# EAGLE board mother (EAGLE 9.3.0)
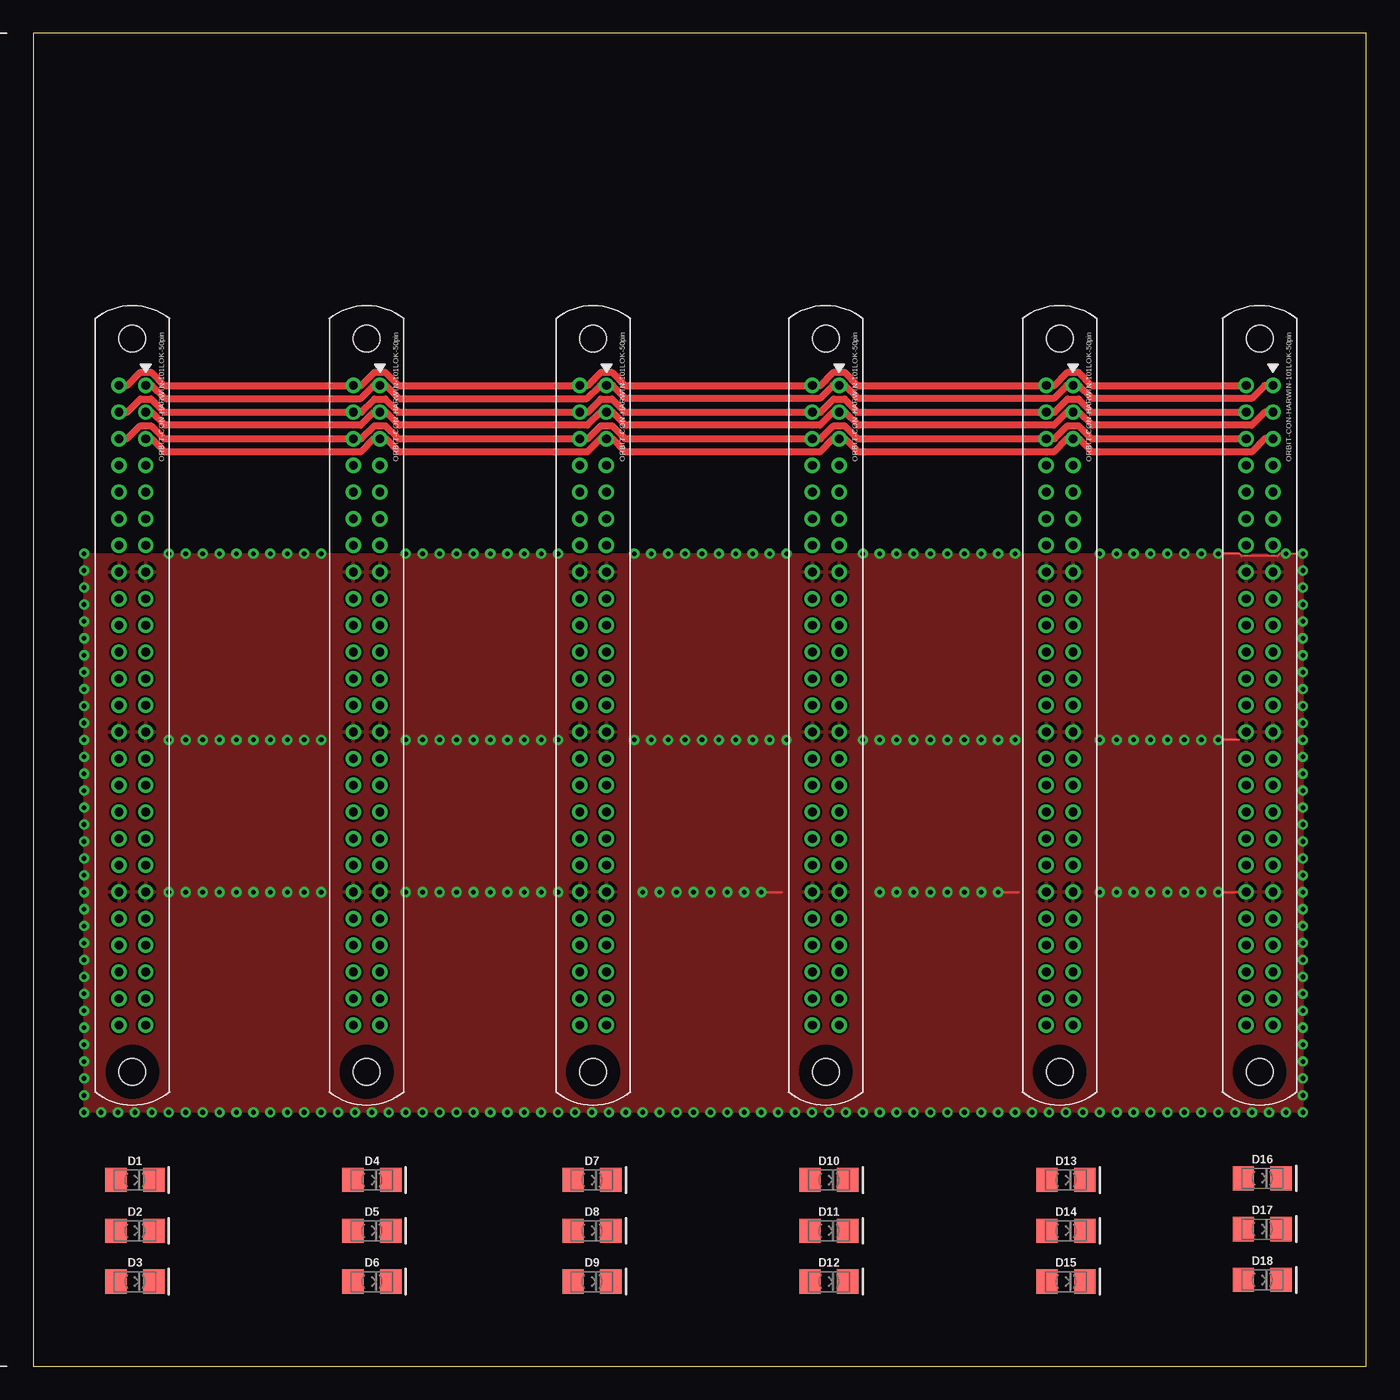
[diagram p0: board, top side]
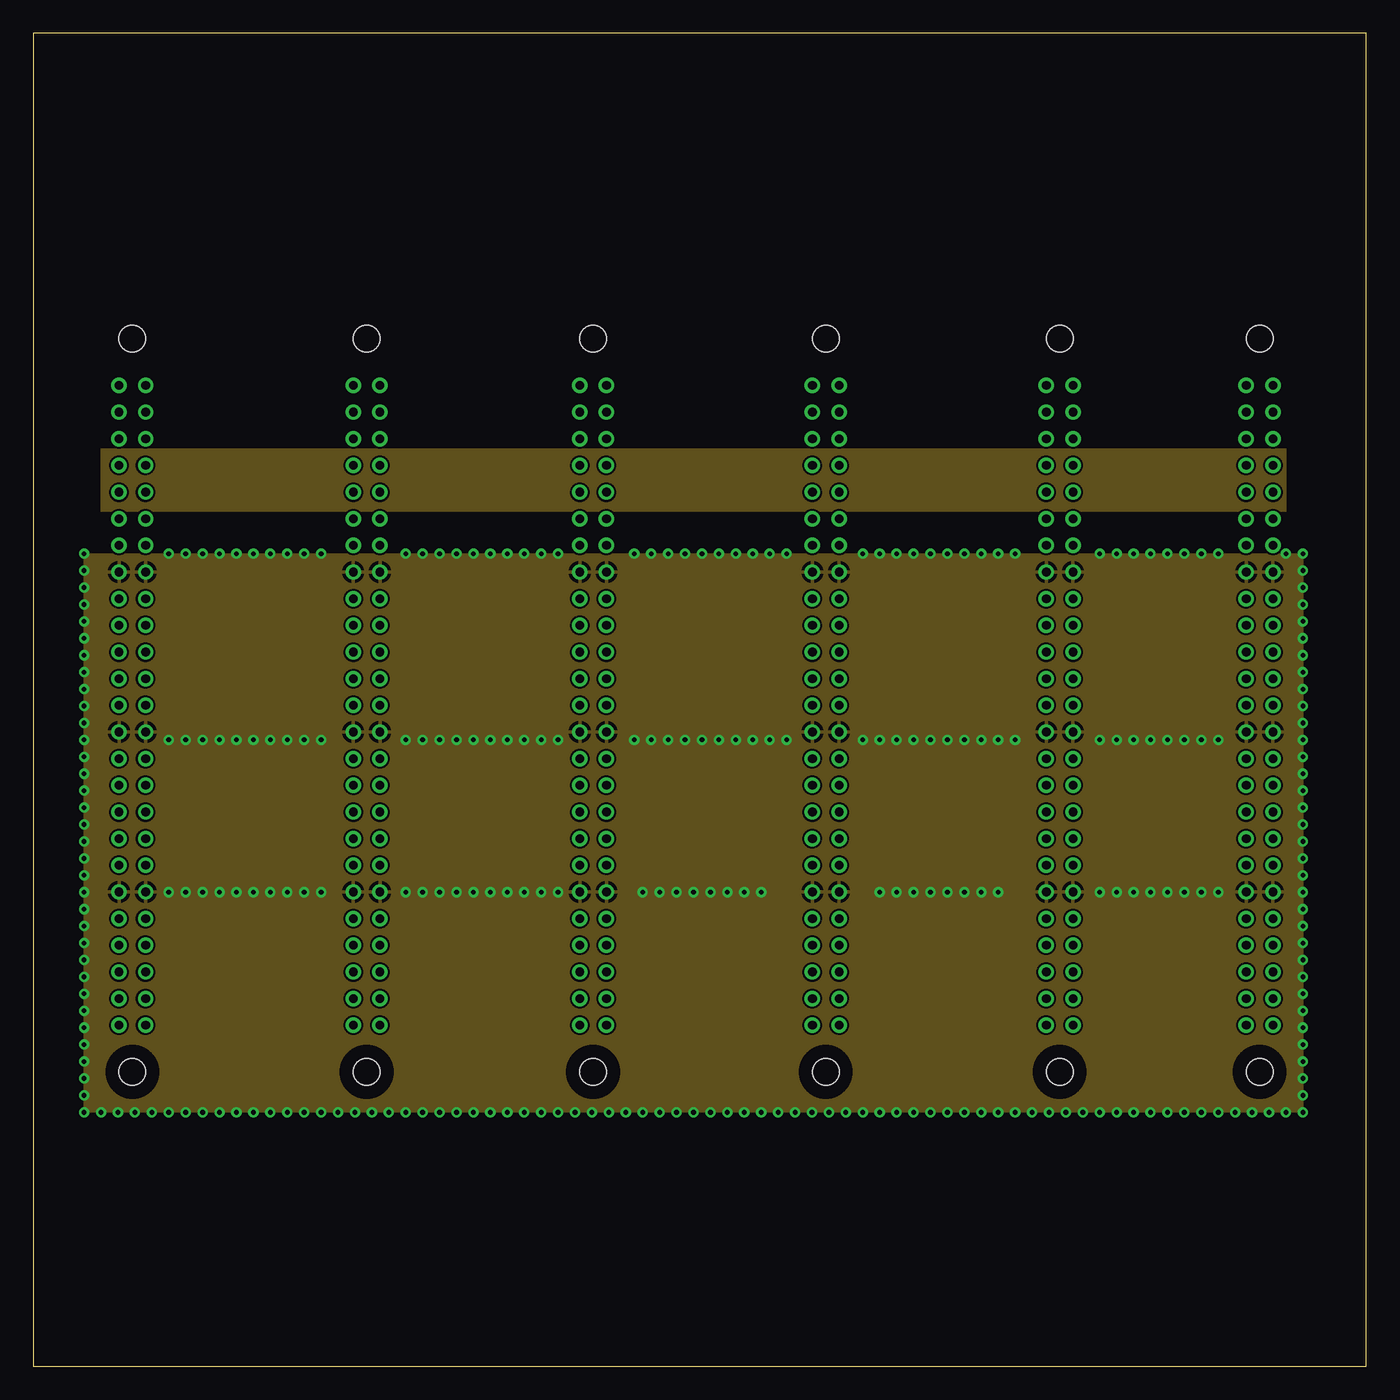
[diagram p1: board, inner layer Route2]
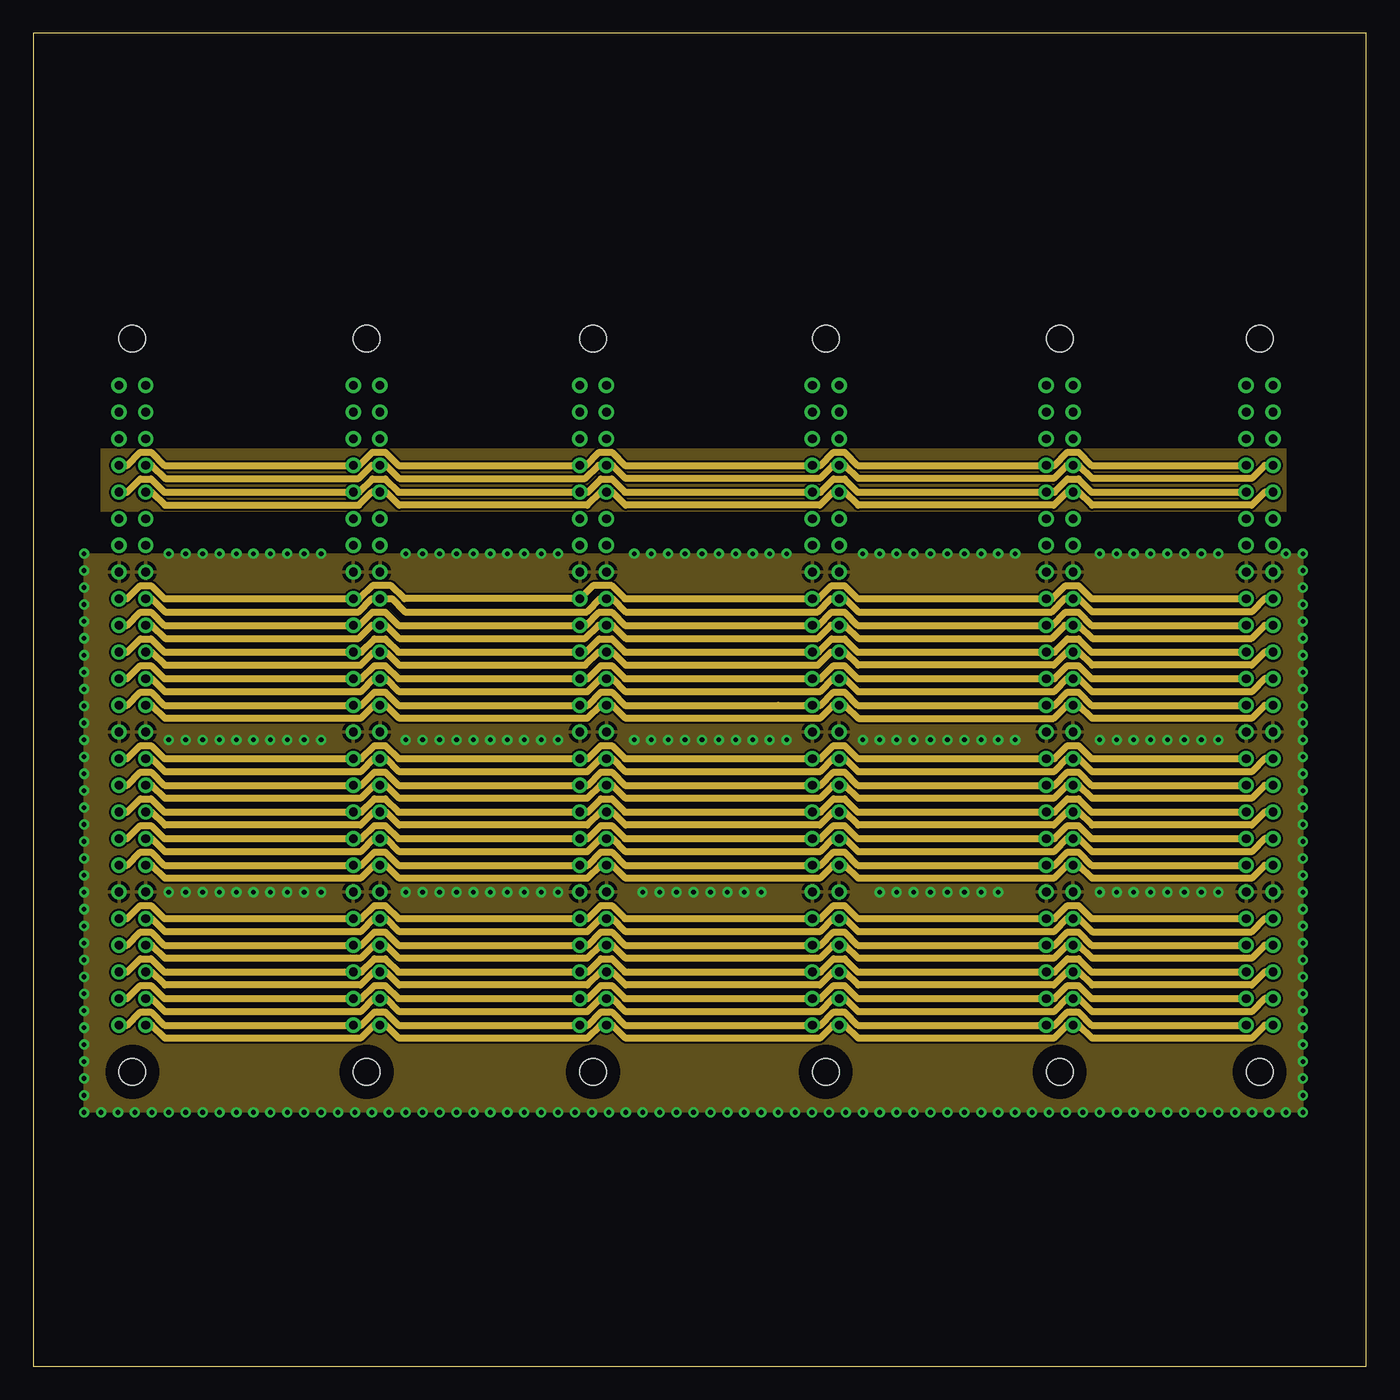
[diagram p2: board, inner layer Route15]
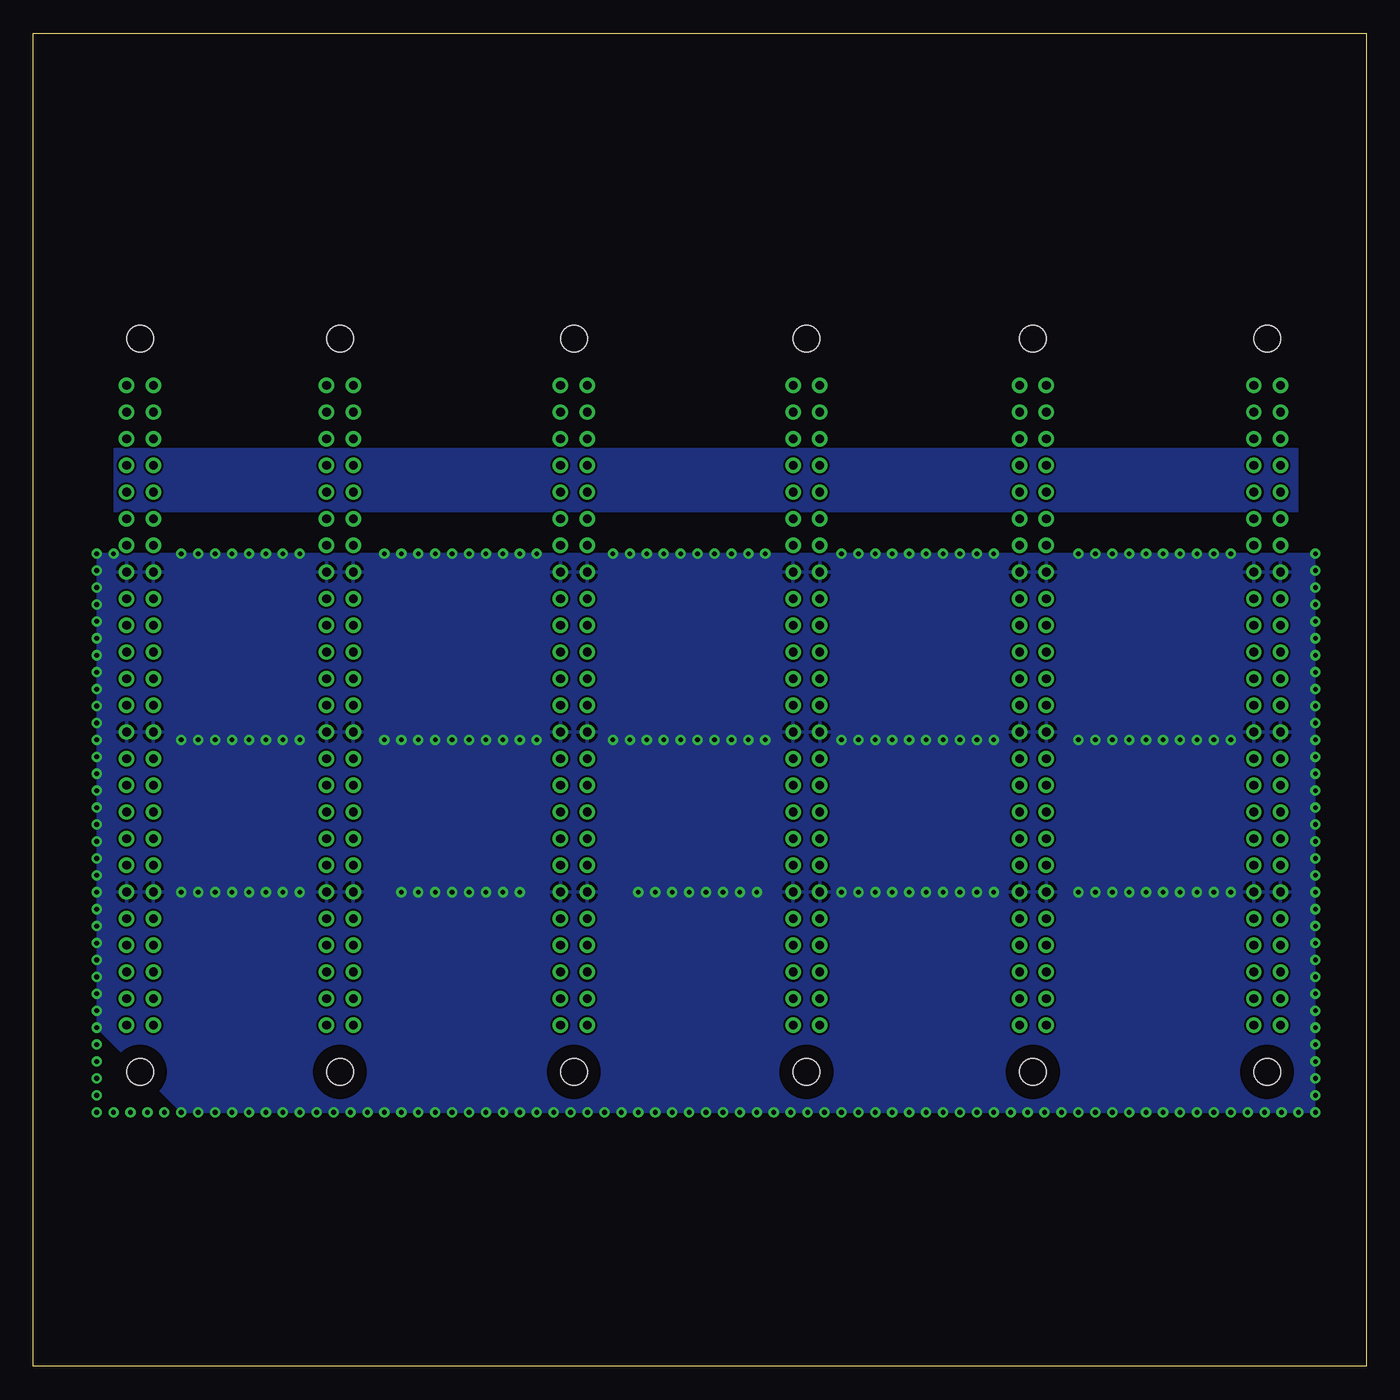
[diagram p3: board, bottom side, seen from below]

Size 100 x 100 mm. Coordinates in mm from the lower left corner, seen from the top.
Outline: 0,0 100,0 100,100 0,100 0,0
Copper layers (1+2*15+16): Top 0.035mm / dielectric 1.5mm / Route2 0.035mm / dielectric 0.15mm / Route15 0.035mm / dielectric 0.2mm / Bottom 0.035mm
Design rules "default *": minimum track width 6mil, minimum drill 0.35mm, track to track 6mil, track to pad 6mil, pad to pad 6mil, via to via 6mil, smd to smd 6mil, copper to edge 40mil, drill to drill 6mil, minimum pad ring 10mil, minimum via ring 8mil, stop-mask expansion 4mil, vias tented up to drill 0mil, thermal gap 10mil

## Footprints (pad centres in the part's own frame; a part is rotated, then mirrored left to right if it is on the bottom)
FKIT-LED-1206 = smd 1.6 x 1.803: A -1.422,0; C 1.422,0
M80-4115042 = drill 0.65: PIN1 0,1; PIN2 2,1; PIN3 4,1; PIN4 6,1; PIN5 8,1; PIN6 10,1; PIN7 12,1; PIN8 14,1; PIN9 16,1; PIN10 18,1; PIN11 20,1; PIN12 22,1; PIN13 24,1; PIN14 26,1; PIN15 28,1; PIN16 30,1; PIN17 32,1; PIN18 34,1; PIN19 36,1; PIN20 38,1; PIN21 40,1; PIN22 42,1; PIN23 44,1; PIN24 46,1; PIN25 48,1; PIN26 0,-1; PIN27 2,-1; PIN28 4,-1; PIN29 6,-1; PIN30 8,-1; PIN31 10,-1; PIN32 12,-1; PIN33 14,-1; PIN34 16,-1; PIN35 18,-1; PIN36 20,-1; PIN37 22,-1; PIN38 24,-1; PIN39 26,-1; PIN40 28,-1; PIN41 30,-1; PIN42 32,-1; PIN43 34,-1; PIN44 36,-1; PIN45 38,-1; PIN46 40,-1; PIN47 42,-1; PIN48 44,-1; PIN49 46,-1; PIN50 48,-1 | hole 2: -3.5,0; 51.5,0

## Placement (x,y rotation side)
D1  [FKIT-LED-1206]  7.62,13.97 0 top
D2  [FKIT-LED-1206]  7.62,10.16 0 top
D3  [FKIT-LED-1206]  7.62,6.35 0 top
D4  [FKIT-LED-1206]  25.4,13.97 0 top
D5  [FKIT-LED-1206]  25.4,10.16 0 top
D6  [FKIT-LED-1206]  25.4,6.35 0 top
D7  [FKIT-LED-1206]  41.91,13.97 0 top
D8  [FKIT-LED-1206]  41.91,10.16 0 top
D9  [FKIT-LED-1206]  41.91,6.35 0 top
D10  [FKIT-LED-1206]  59.69,13.97 0 top
D11  [FKIT-LED-1206]  59.69,10.16 0 top
D12  [FKIT-LED-1206]  59.69,6.35 0 top
D13  [FKIT-LED-1206]  77.47,13.97 0 top
D14  [FKIT-LED-1206]  77.47,10.16 0 top
D15  [FKIT-LED-1206]  77.47,6.35 0 top
D16  [FKIT-LED-1206]  92.2,14.1 0 top
D17  [FKIT-LED-1206]  92.2,10.29 0 top
D18  [FKIT-LED-1206]  92.2,6.48 0 top
U$1  CARD_EDGE_50PINM80-4115042  [M80-4115042]  7.43,73.58 270 top
U$2  CARD_EDGE_50PINM80-4115042  [M80-4115042]  25,73.58 270 top
U$3  CARD_EDGE_50PINM80-4115042  [M80-4115042]  77,73.58 270 top
U$4  CARD_EDGE_50PINM80-4115042  [M80-4115042]  42,73.58 270 top
U$5  CARD_EDGE_50PINM80-4115042  [M80-4115042]  59.45,73.58 270 top
U$6  CARD_EDGE_50PINM80-4115042  [M80-4115042]  92,73.58 270 top

## Library data of the parts
D1-D18 = SparkFun-LED
U$1-U$6 = ORBIT-CON-HARWIN-101LOK

## Nets
3V_GND: U$1.PIN28 U$2.PIN28 U$3.PIN28 U$4.PIN28 U$5.PIN28 U$6.PIN28
5V_GND: U$1.PIN2 U$2.PIN2 U$3.PIN2 U$4.PIN2 U$5.PIN2 U$6.PIN2
12V_GND: U$1.PIN26 U$2.PIN26 U$3.PIN26 U$4.PIN26 U$5.PIN26 U$6.PIN26
+3V: U$1.PIN3 U$2.PIN3 U$3.PIN3 U$4.PIN3 U$5.PIN3 U$6.PIN3
+5V: U$1.PIN27 U$2.PIN27 U$3.PIN27 U$4.PIN27 U$5.PIN27 U$6.PIN27
+12V: U$1.PIN1 U$2.PIN1 U$3.PIN1 U$4.PIN1 U$5.PIN1 U$6.PIN1
CAN_H_P: U$1.PIN4 U$2.PIN4 U$3.PIN4 U$4.PIN4 U$5.PIN4 U$6.PIN4
CAN_H_S: U$1.PIN29 U$2.PIN29 U$3.PIN29 U$4.PIN29 U$5.PIN29 U$6.PIN29
CAN_L_P: U$1.PIN5 U$2.PIN5 U$3.PIN5 U$4.PIN5 U$5.PIN5 U$6.PIN5
CAN_L_S: U$1.PIN30 U$2.PIN30 U$3.PIN30 U$4.PIN30 U$5.PIN30 U$6.PIN30
LAN_CLK_N0: U$1.PIN9 U$2.PIN9 U$3.PIN9 U$4.PIN9 U$5.PIN9 U$6.PIN9
LAN_CLK_N1: U$1.PIN15 U$2.PIN15 U$3.PIN15 U$4.PIN15 U$5.PIN15 U$6.PIN15
LAN_CLK_N2: U$1.PIN21 U$2.PIN21 U$3.PIN21 U$4.PIN21 U$5.PIN21 U$6.PIN21
LAN_CLK_N3: U$1.PIN34 U$2.PIN34 U$3.PIN34 U$4.PIN34 U$5.PIN34 U$6.PIN34
LAN_CLK_N4: U$1.PIN40 U$2.PIN40 U$3.PIN40 U$4.PIN40 U$5.PIN40 U$6.PIN40
LAN_CLK_N5: U$1.PIN46 U$2.PIN46 U$3.PIN46 U$4.PIN46 U$5.PIN46 U$6.PIN46
LAN_CLK_P0: U$1.PIN10 U$2.PIN10 U$3.PIN10 U$4.PIN10 U$5.PIN10 U$6.PIN10
LAN_CLK_P1: U$1.PIN16 U$2.PIN16 U$3.PIN16 U$4.PIN16 U$5.PIN16 U$6.PIN16
LAN_CLK_P2: U$1.PIN22 U$2.PIN22 U$3.PIN22 U$4.PIN22 U$5.PIN22 U$6.PIN22
LAN_CLK_P3: U$1.PIN35 U$2.PIN35 U$3.PIN35 U$4.PIN35 U$5.PIN35 U$6.PIN35
LAN_CLK_P4: U$1.PIN41 U$2.PIN41 U$3.PIN41 U$4.PIN41 U$5.PIN41 U$6.PIN41
LAN_CLK_P5: U$1.PIN47 U$2.PIN47 U$3.PIN47 U$4.PIN47 U$5.PIN47 U$6.PIN47
LAN_N0: U$1.PIN11 U$2.PIN11 U$3.PIN11 U$4.PIN11 U$5.PIN11 U$6.PIN11
LAN_N1: U$1.PIN17 U$2.PIN17 U$3.PIN17 U$4.PIN17 U$5.PIN17 U$6.PIN17
LAN_N2: U$1.PIN23 U$2.PIN23 U$3.PIN23 U$4.PIN23 U$5.PIN23 U$6.PIN23
LAN_N3: U$1.PIN36 U$2.PIN36 U$3.PIN36 U$4.PIN36 U$5.PIN36 U$6.PIN36
LAN_N4: U$1.PIN42 U$2.PIN42 U$3.PIN42 U$4.PIN42 U$5.PIN42 U$6.PIN42
LAN_N5: U$1.PIN48 U$2.PIN48 U$3.PIN48 U$4.PIN48 U$5.PIN48 U$6.PIN48
LAN_P0: U$1.PIN12 U$2.PIN12 U$3.PIN12 U$4.PIN12 U$5.PIN12 U$6.PIN12
LAN_P1: U$1.PIN18 U$2.PIN18 U$3.PIN18 U$4.PIN18 U$5.PIN18 U$6.PIN18
LAN_P2: U$1.PIN24 U$2.PIN24 U$3.PIN24 U$4.PIN24 U$5.PIN24 U$6.PIN24
LAN_P3: U$1.PIN37 U$2.PIN37 U$3.PIN37 U$4.PIN37 U$5.PIN37 U$6.PIN37
LAN_P4: U$1.PIN43 U$2.PIN43 U$3.PIN43 U$4.PIN43 U$5.PIN43 U$6.PIN43
LAN_P5: U$1.PIN49 U$2.PIN49 U$3.PIN49 U$4.PIN49 U$5.PIN49 U$6.PIN49
LED1_B1: U$5.PIN6
LED2_B1: U$5.PIN7
LED3_B1: U$5.PIN31
NOTE0: U$1.PIN13 U$2.PIN13 U$3.PIN13 U$4.PIN13 U$5.PIN13 U$6.PIN13
NOTE1: U$1.PIN19 U$2.PIN19 U$3.PIN19 U$4.PIN19 U$5.PIN19 U$6.PIN19
NOTE2: U$1.PIN25 U$2.PIN25 U$3.PIN25 U$4.PIN25 U$5.PIN25 U$6.PIN25
NOTE3: U$1.PIN38 U$2.PIN38 U$3.PIN38 U$4.PIN38 U$5.PIN38 U$6.PIN38
NOTE4: U$1.PIN44 U$2.PIN44 U$3.PIN44 U$4.PIN44 U$5.PIN44 U$6.PIN44
NOTE5: U$1.PIN50 U$2.PIN50 U$3.PIN50 U$4.PIN50 U$5.PIN50 U$6.PIN50
SIGNAL_GND: U$1.PIN8 U$1.PIN14 U$1.PIN20 U$1.PIN33 U$1.PIN39 U$1.PIN45 U$2.PIN8 U$2.PIN14 U$2.PIN20 U$2.PIN33 U$2.PIN39 U$2.PIN45 U$3.PIN8 U$3.PIN14 U$3.PIN20 U$3.PIN33 U$3.PIN39 U$3.PIN45 U$4.PIN8 U$4.PIN14 U$4.PIN20 U$4.PIN33 U$4.PIN39 U$4.PIN45 U$5.PIN8 U$5.PIN14 U$5.PIN20 U$5.PIN33 U$5.PIN39 U$5.PIN45 U$6.PIN8 U$6.PIN14 U$6.PIN20 U$6.PIN33 U$6.PIN39 U$6.PIN45

## Tracks (layer width: path | path; a pad name or v marks a point on that pad's centre or on a via)
3V_GND
  Top 0.508: U$1.PIN28 7.04,69.58 8.02,70.56 8.84,70.56 9.82,69.58 U$2.PIN28 24.61,69.58 25.59,70.56 26.41,70.56 27.39,69.58 U$4.PIN28 41.61,69.58 42.59,70.56 43.41,70.56 44.39,69.58 U$5.PIN28 59.06,69.58 60.04,70.56 60.86,70.56 61.84,69.58 U$3.PIN28 76.61,69.58 77.59,70.56 78.41,70.56 79.39,69.58 U$6.PIN28
5V_GND
  Top 0.508: U$6.PIN2 92.39,71.58 91.41,70.59 79.44,70.59 78.46,71.58 U$3.PIN2 77.54,71.58 76.56,70.59 61.9,70.59 60.91,71.58 U$5.PIN2 59.99,71.58 59.01,70.59 44.45,70.59 43.46,71.58 U$4.PIN2 42.54,71.58 41.55,70.59 27.45,70.59 26.46,71.58 U$2.PIN2 25.54,71.58 24.55,70.59 9.88,70.59 8.89,71.58 U$1.PIN2
12V_GND
  Top 0.508: U$1.PIN26 7.04,73.58 8.02,74.56 8.84,74.56 9.82,73.58 U$2.PIN26 24.61,73.58 25.59,74.56 26.41,74.56 27.39,73.58 U$4.PIN26 41.61,73.58 42.59,74.56 43.41,74.56 44.39,73.58 U$5.PIN26 59.06,73.58 60.04,74.56 60.86,74.56 61.84,73.58 U$3.PIN26 76.61,73.58 77.59,74.56 78.41,74.56 79.39,73.58 U$6.PIN26
+3V
  Top 0.508: U$6.PIN3 92.39,69.58 91.41,68.59 79.44,68.59 78.46,69.58 U$3.PIN3 77.54,69.58 76.56,68.59 61.9,68.59 60.8,69.69 60.56,69.69 U$5.PIN3 59.99,69.58 59.01,68.59 44.45,68.59 43.46,69.58 U$4.PIN3 42.54,69.58 41.55,68.59 27.45,68.59 26.46,69.58 U$2.PIN3 25.54,69.58 24.55,68.59 9.88,68.59 8.89,69.58 U$1.PIN3
+5V
  Top 0.508: U$1.PIN27 7.04,71.58 8.02,72.56 8.84,72.56 9.82,71.58 U$2.PIN27 24.61,71.58 25.59,72.56 26.41,72.56 27.39,71.58 U$4.PIN27 41.61,71.58 42.59,72.56 43.41,72.56 44.39,71.58 U$5.PIN27 59.06,71.58 60.04,72.56 60.86,72.56 61.84,71.58 U$3.PIN27 76.61,71.58 77.59,72.56 78.41,72.56 79.39,71.58 U$6.PIN27
+12V
  Top 0.508: U$6.PIN1 92.39,73.58 91.41,72.59 79.44,72.59 78.46,73.58 U$3.PIN1 77.54,73.58 76.56,72.59 61.9,72.59 60.91,73.58 U$5.PIN1 59.99,73.58 59.01,72.59 44.45,72.59 43.46,73.58 U$4.PIN1 42.54,73.58 41.55,72.59 27.45,72.59 26.46,73.58 U$2.PIN1 25.54,73.58 24.55,72.59 9.88,72.59 8.89,73.58 U$1.PIN1
CAN_H_P
  Route15 0.508: U$1.PIN4 8.89,67.58 9.88,66.59 24.41,66.59 25.39,67.58 U$2.PIN4 26.46,67.58 27.45,66.59 41.41,66.59 42.39,67.58 | 42.39,67.58 U$4.PIN4 | U$6.PIN4 92.39,67.58 91.41,66.59 79.44,66.59 78.46,67.58 U$3.PIN4 77.54,67.58 76.56,66.59 61.9,66.59 60.91,67.58 U$5.PIN4 59.99,67.58 59.01,66.59 44.45,66.59 43.46,67.58 42.39,67.58
CAN_H_S
  Route15 0.508: U$1.PIN29 7.04,67.58 8.02,68.56 8.84,68.56 9.82,67.58 U$2.PIN29 24.46,67.58 25.45,68.56 26.41,68.56 27.39,67.58 U$4.PIN29 41.46,67.58 42.45,68.56 43.41,68.56 44.39,67.58 U$5.PIN29 59.06,67.58 60.04,68.56 60.86,68.56 61.84,67.58 U$3.PIN29 76.61,67.58 77.59,68.56 78.41,68.56 79.39,67.58 U$6.PIN29
CAN_L_P
  Route15 0.508: U$1.PIN5 8.89,65.58 9.88,64.59 24.41,64.59 25.39,65.58 | 25.39,65.58 U$2.PIN5 | U$6.PIN5 92.39,65.58 91.41,64.59 79.44,64.59 78.46,65.58 U$3.PIN5 77.54,65.58 76.56,64.59 61.9,64.59 60.91,65.58 U$5.PIN5 59.99,65.58 59.01,64.59 44.45,64.59 43.46,65.58 U$4.PIN5 42.54,65.58 41.55,64.59 27.45,64.59 26.46,65.58 25.39,65.58
CAN_L_S
  Route15 0.508: U$1.PIN30 7.04,65.58 8.02,66.56 8.84,66.56 9.82,65.58 U$2.PIN30 24.46,65.58 25.45,66.56 26.41,66.56 27.39,65.58 U$4.PIN30 41.61,65.58 42.59,66.56 43.41,66.56 44.39,65.58 U$5.PIN30 59.06,65.58 60.04,66.56 60.86,66.56 61.84,65.58 U$3.PIN30 76.61,65.58 77.59,66.56 78.41,66.56 79.39,65.58 U$6.PIN30
LAN_CLK_N0
  Route15 0.508: U$1.PIN9 8.89,57.58 9.88,56.59 24.41,56.59 25.39,57.58 U$2.PIN9 26.91,57.58 27.89,56.59 41.54,56.59 42.53,57.58 U$4.PIN9 43.46,57.58 44.45,56.59 58.86,56.59 59.84,57.58 U$5.PIN9 60.91,57.58 61.9,56.59 76.41,56.59 77.39,57.58 77.47,57.58 | 77.47,57.58 U$3.PIN9 | 77.47,57.58 78.46,57.58 79.44,56.59 91.41,56.59 92.39,57.58 U$6.PIN9
LAN_CLK_N1
  Route15 0.508: U$6.PIN15 92.39,45.58 91.41,44.59 79.44,44.59 78.46,45.58 U$3.PIN15 77.54,45.58 76.56,44.59 61.9,44.59 60.91,45.58 U$5.PIN15 59.99,45.58 59.01,44.59 44.45,44.59 43.46,45.58 U$4.PIN15 42.54,45.58 41.55,44.59 27.45,44.59 26.46,45.58 U$2.PIN15 25.54,45.58 24.55,44.59 9.88,44.59 8.89,45.58 U$1.PIN15
LAN_CLK_N2
  Route15 0.508: U$6.PIN21 92.39,33.58 91.41,32.59 79.44,32.59 78.46,33.58 U$3.PIN21 77.54,33.58 76.56,32.59 61.9,32.59 60.91,33.58 U$5.PIN21 59.99,33.58 59.01,32.59 44.45,32.59 43.46,33.58 U$4.PIN21 42.54,33.58 41.55,32.59 27.45,32.59 26.46,33.58 U$2.PIN21 25.54,33.58 24.55,32.59 9.88,32.59 8.89,33.58 U$1.PIN21
LAN_CLK_N3
  Route15 0.508: U$1.PIN34 7.04,57.58 8.02,58.56 8.84,58.56 9.82,57.58 U$2.PIN34 24.46,57.58 25.45,58.56 26.86,58.56 27.84,57.58 U$4.PIN34 41.98,58.56 43.41,58.56 44.39,57.58 U$5.PIN34 58.91,57.58 59.9,58.56 60.86,58.56 61.84,57.58 U$3.PIN34 76.46,57.58 77.44,58.56 78.41,58.56 79.39,57.58 U$6.PIN34
LAN_CLK_N4
  Route15 0.508: U$1.PIN40 7.04,45.58 8.02,46.56 8.84,46.56 9.82,45.58 U$2.PIN40 24.61,45.58 25.59,46.56 26.41,46.56 27.39,45.58 U$4.PIN40 41.61,45.58 42.59,46.56 43.41,46.56 44.39,45.58 U$5.PIN40 59.06,45.58 60.04,46.56 60.86,46.56 61.84,45.58 U$3.PIN40 76.61,45.58 77.59,46.56 78.41,46.56 79.39,45.58 U$6.PIN40
LAN_CLK_N5
  Route15 0.508: U$1.PIN46 7.04,33.58 8.02,34.56 8.84,34.56 9.82,33.58 U$2.PIN46 24.61,33.58 25.59,34.56 26.41,34.56 27.39,33.58 U$4.PIN46 41.61,33.58 42.59,34.56 43.41,34.56 44.39,33.58 U$5.PIN46 59.06,33.58 60.04,34.56 60.86,34.56 61.84,33.58 U$3.PIN46 76.61,33.58 77.59,34.56 78.41,34.56 79.39,33.58 U$6.PIN46
LAN_CLK_P0
  Route15 0.508: U$1.PIN10 8.89,55.58 9.88,54.59 24.41,54.59 25.39,55.58 U$2.PIN10 26.46,55.58 27.45,54.59 41.41,54.59 42.39,55.58 U$4.PIN10 43.46,55.58 44.45,54.59 58.86,54.59 59.84,55.58 U$5.PIN10 60.91,55.58 61.9,54.59 76.41,54.59 77.39,55.58 U$3.PIN10 78.46,55.58 79.44,54.59 91.41,54.59 92.39,55.58 U$6.PIN10
LAN_CLK_P1
  Route15 0.508: U$6.PIN16 92.39,43.58 91.41,42.59 79.44,42.59 78.46,43.58 U$3.PIN16 77.54,43.58 76.56,42.59 61.9,42.59 60.91,43.58 U$5.PIN16 59.99,43.58 59.01,42.59 44.45,42.59 43.46,43.58 U$4.PIN16 42.54,43.58 41.55,42.59 27.45,42.59 26.46,43.58 U$2.PIN16 25.54,43.58 24.55,42.59 9.88,42.59 8.89,43.58 U$1.PIN16
LAN_CLK_P2
  Route15 0.508: U$6.PIN22 92.39,31.58 91.41,30.59 79.44,30.59 78.46,31.58 U$3.PIN22 77.54,31.58 76.56,30.59 61.9,30.59 60.91,31.58 U$5.PIN22 59.99,31.58 59.01,30.59 44.45,30.59 43.46,31.58 U$4.PIN22 42.54,31.58 41.55,30.59 27.45,30.59 26.46,31.58 U$2.PIN22 25.54,31.58 24.55,30.59 9.88,30.59 8.89,31.58 U$1.PIN22
LAN_CLK_P3
  Route15 0.508: U$1.PIN35 7.04,55.58 8.02,56.56 8.84,56.56 9.82,55.58 U$2.PIN35 24.46,55.58 25.45,56.56 26.41,56.56 27.39,55.58 U$4.PIN35 41.46,55.58 42.45,56.56 43.41,56.56 44.39,55.58 U$5.PIN35 58.91,55.58 59.9,56.56 60.86,56.56 61.84,55.58 U$3.PIN35 76.46,55.58 77.44,56.56 78.41,56.56 79.39,55.58 U$6.PIN35
LAN_CLK_P4
  Route15 0.508: U$1.PIN41 7.04,43.58 8.02,44.56 8.84,44.56 9.82,43.58 U$2.PIN41 24.61,43.58 25.59,44.56 26.41,44.56 27.39,43.58 U$4.PIN41 41.61,43.58 42.59,44.56 43.41,44.56 44.39,43.58 U$5.PIN41 59.06,43.58 60.04,44.56 60.86,44.56 61.84,43.58 U$3.PIN41 76.61,43.58 77.59,44.56 78.41,44.56 79.39,43.58 U$6.PIN41
LAN_CLK_P5
  Route15 0.508: U$6.PIN47 79.39,31.58 78.41,32.56 77.59,32.56 76.61,31.58 U$3.PIN47 61.84,31.58 60.86,32.56 60.04,32.56 59.06,31.58 U$5.PIN47 44.39,31.58 43.41,32.56 42.59,32.56 41.61,31.58 U$4.PIN47 27.39,31.58 26.41,32.56 25.59,32.56 24.61,31.58 U$2.PIN47 9.82,31.58 8.84,32.56 8.02,32.56 7.04,31.58 U$1.PIN47
LAN_N0
  Route15 0.508: U$2.PIN11 26.46,53.58 | 26.46,53.58 27.45,52.59 41.41,52.59 42.39,53.58 U$4.PIN11 43.46,53.58 44.45,52.59 58.86,52.59 59.84,53.58 U$5.PIN11 60.91,53.58 61.9,52.59 76.56,52.59 77.54,53.58 U$3.PIN11 78.46,53.58 79.44,52.59 91.41,52.59 92.39,53.58 U$6.PIN11 | U$1.PIN11 8.89,53.58 9.88,52.59 24.55,52.59 25.54,53.58 26.46,53.58
LAN_N1
  Route15 0.508: U$6.PIN17 92.39,41.58 91.41,40.59 79.44,40.59 78.46,41.58 U$3.PIN17 77.54,41.58 76.56,40.59 61.9,40.59 60.91,41.58 U$5.PIN17 59.99,41.58 59.01,40.59 44.45,40.59 43.46,41.58 U$4.PIN17 42.54,41.58 41.55,40.59 27.45,40.59 26.46,41.58 U$2.PIN17 25.54,41.58 24.55,40.59 9.88,40.59 8.89,41.58 U$1.PIN17
LAN_N2
  Route15 0.508: U$6.PIN23 92.39,29.58 91.41,28.59 79.44,28.59 78.46,29.58 U$3.PIN23 77.54,29.58 76.56,28.59 61.9,28.59 60.91,29.58 U$5.PIN23 59.99,29.58 59.01,28.59 44.45,28.59 43.46,29.58 U$4.PIN23 42.54,29.58 41.55,28.59 27.45,28.59 26.46,29.58 U$2.PIN23 25.54,29.58 24.55,28.59 9.88,28.59 8.89,29.58 U$1.PIN23
LAN_N3
  Route15 0.508: U$1.PIN36 7.04,53.58 8.02,54.56 8.84,54.56 9.82,53.58 U$2.PIN36 24.61,53.58 25.59,54.56 26.41,54.56 27.39,53.58 U$4.PIN36 41.46,53.58 42.45,54.56 43.41,54.56 44.39,53.58 U$5.PIN36 58.91,53.58 59.9,54.56 60.86,54.56 61.84,53.58 U$3.PIN36 76.61,53.58 77.59,54.56 78.41,54.56 79.39,53.58 U$6.PIN36
LAN_N4
  Route15 0.508: U$1.PIN42 7.04,41.58 8.02,42.56 8.84,42.56 9.82,41.58 U$2.PIN42 24.61,41.58 25.59,42.56 26.41,42.56 27.39,41.58 U$4.PIN42 41.61,41.58 42.59,42.56 43.41,42.56 44.39,41.58 U$5.PIN42 59.06,41.58 60.04,42.56 60.86,42.56 61.84,41.58 U$3.PIN42 76.61,41.58 77.59,42.56 78.41,42.56 79.39,41.58 U$6.PIN42
LAN_N5
  Route15 0.508: U$1.PIN48 7.04,29.58 8.02,30.57 8.84,30.57 9.82,29.58 U$2.PIN48 24.61,29.58 25.59,30.57 26.41,30.57 27.39,29.58 U$4.PIN48 41.61,29.58 42.59,30.57 43.41,30.57 44.39,29.58 U$5.PIN48 59.06,29.58 60.04,30.57 60.86,30.57 61.84,29.58 U$3.PIN48 76.61,29.58 77.59,30.57 78.41,30.57 79.39,29.58 U$6.PIN48
LAN_P0
  Route15 0.508: U$6.PIN12 92.39,51.58 91.41,50.59 79.44,50.59 78.46,51.58 U$3.PIN12 77.54,51.58 76.56,50.59 61.9,50.59 60.91,51.58 U$5.PIN12 59.99,51.58 59.01,50.59 44.45,50.59 43.46,51.58 U$4.PIN12 42.54,51.58 41.55,50.59 27.45,50.59 26.46,51.58 U$2.PIN12 25.54,51.58 24.55,50.59 9.88,50.59 8.89,51.58 U$1.PIN12
LAN_P1
  Route15 0.508: U$6.PIN18 92.39,39.58 91.41,38.59 79.44,38.59 78.46,39.58 U$3.PIN18 77.54,39.58 76.56,38.59 61.9,38.59 60.91,39.58 U$5.PIN18 59.99,39.58 59.01,38.59 44.45,38.59 43.46,39.58 U$4.PIN18 42.54,39.58 41.55,38.59 27.45,38.59 26.46,39.58 U$2.PIN18 25.54,39.58 24.55,38.59 9.88,38.59 8.89,39.58 U$1.PIN18
LAN_P2
  Route15 0.508: U$6.PIN24 92.39,27.58 91.41,26.59 79.44,26.59 78.46,27.58 U$3.PIN24 77.54,27.58 76.56,26.59 61.9,26.59 60.91,27.58 U$5.PIN24 59.99,27.58 59.01,26.59 44.45,26.59 43.46,27.58 U$4.PIN24 42.54,27.58 41.55,26.59 27.45,26.59 26.46,27.58 U$2.PIN24 25.54,27.58 24.55,26.59 9.88,26.59 8.89,27.58 U$1.PIN24
LAN_P3
  Route15 0.508: U$1.PIN37 7.04,51.58 8.02,52.56 8.84,52.56 9.82,51.58 U$2.PIN37 24.61,51.58 25.59,52.56 26.41,52.56 27.39,51.58 U$4.PIN37 41.61,51.58 42.59,52.56 43.41,52.56 44.39,51.58 U$5.PIN37 59.06,51.58 60.04,52.56 60.86,52.56 61.84,51.58 U$3.PIN37 76.61,51.58 77.59,52.56 78.41,52.56 79.39,51.58 U$6.PIN37
LAN_P4
  Route15 0.508: U$1.PIN43 7.04,39.58 8.02,40.56 8.84,40.56 9.82,39.58 U$2.PIN43 24.61,39.58 25.59,40.56 26.41,40.56 27.39,39.58 U$4.PIN43 41.61,39.58 42.59,40.56 43.41,40.56 44.39,39.58 U$5.PIN43 59.06,39.58 60.04,40.56 60.86,40.56 61.84,39.58 U$3.PIN43 76.61,39.58 77.59,40.56 78.41,40.56 79.39,39.58 U$6.PIN43
LAN_P5
  Route15 0.508: U$1.PIN49 7.04,27.58 8.02,28.57 8.84,28.57 9.82,27.58 U$2.PIN49 24.61,27.58 25.59,28.57 26.41,28.57 27.39,27.58 U$4.PIN49 41.61,27.58 42.59,28.57 43.41,28.57 44.39,27.58 U$5.PIN49 59.06,27.58 60.04,28.57 60.86,28.57 61.84,27.58 U$3.PIN49 76.61,27.58 77.59,28.57 78.41,28.57 79.39,27.58 U$6.PIN49
NOTE0
  Route15 0.508: U$6.PIN13 92.39,49.58 91.41,48.59 79.44,48.59 78.46,49.58 U$3.PIN13 77.54,49.58 76.56,48.59 61.9,48.59 60.91,49.58 U$5.PIN13 59.99,49.58 59.01,48.59 44.45,48.59 43.46,49.58 U$4.PIN13 42.54,49.58 41.55,48.59 27.45,48.59 26.46,49.58 U$2.PIN13 25.54,49.58 24.55,48.59 9.88,48.59 8.89,49.58 U$1.PIN13
NOTE1
  Route15 0.508: U$6.PIN19 92.39,37.58 91.41,36.59 79.44,36.59 78.46,37.58 U$3.PIN19 77.54,37.58 76.56,36.59 61.9,36.59 60.91,37.58 U$5.PIN19 59.99,37.58 59.01,36.59 44.45,36.59 43.46,37.58 U$4.PIN19 42.54,37.58 41.55,36.59 27.45,36.59 26.46,37.58 U$2.PIN19 25.54,37.58 24.55,36.59 9.88,36.59 8.89,37.58 U$1.PIN19
NOTE2
  Route15 0.508: U$6.PIN25 92.39,25.58 91.41,24.59 79.44,24.59 78.46,25.58 U$3.PIN25 77.54,25.58 76.56,24.59 61.9,24.59 60.91,25.58 U$5.PIN25 59.99,25.58 59.01,24.59 44.45,24.59 43.46,25.58 U$4.PIN25 42.54,25.58 41.55,24.59 27.45,24.59 26.46,25.58 U$2.PIN25 25.54,25.58 24.55,24.59 9.88,24.59 8.89,25.58 U$1.PIN25
NOTE3
  Route15 0.508: 24.08,49.58 24.13,49.53 24.08,49.58 | U$1.PIN38 7.04,49.58 8.02,50.56 8.84,50.56 9.82,49.58 U$2.PIN38 | U$2.PIN38 24.08,49.58 | U$2.PIN38 24.08,49.58 | U$2.PIN38 24.61,49.58 25.59,50.56 26.41,50.56 27.39,49.58 U$4.PIN38 41.61,49.58 42.59,50.56 43.41,50.56 44.39,49.58 55.88,49.58 U$5.PIN38 59.06,49.58 60.04,50.56 60.86,50.56 61.84,49.58 U$3.PIN38 76.61,49.58 77.59,50.56 78.41,50.56 79.39,49.58 U$6.PIN38
NOTE4
  Route15 0.508: U$1.PIN44 7.04,37.58 8.02,38.56 8.84,38.56 9.82,37.58 U$2.PIN44 24.61,37.58 25.59,38.56 26.41,38.56 27.39,37.58 U$4.PIN44 41.61,37.58 42.59,38.56 43.41,38.56 44.39,37.58 U$5.PIN44 59.06,37.58 60.04,38.56 60.86,38.56 61.84,37.58 U$3.PIN44 76.61,37.58 77.59,38.56 78.41,38.56 79.39,37.58 U$6.PIN44
NOTE5
  Route15 0.508: U$1.PIN50 7.04,25.58 8.02,26.57 8.84,26.57 9.82,25.58 U$2.PIN50 24.61,25.58 25.59,26.57 26.41,26.57 27.39,25.58 U$4.PIN50 41.61,25.58 42.59,26.57 43.41,26.57 44.39,25.58 U$5.PIN50 59.06,25.58 60.04,26.57 60.86,26.57 61.84,25.58 U$3.PIN50 76.61,25.58 77.59,26.57 78.41,26.57 79.39,25.58 U$6.PIN50
SIGNAL_GND  (via drill 0.35)
  Top 0.152: v88.9,60.96 90.48,60.96 90.67,60.77 93.33,60.77 93.52,60.96 v93.98,60.96 v95.25,60.96 | 56.19,35.56 v54.61,35.56 | 73.97,35.56 v72.39,35.56 | 90.48,35.56 v88.9,35.56 | 90.48,46.99 v88.9,46.99
  other vias: 10.16,60.96 11.43,60.96 12.7,60.96 13.97,60.96 15.24,60.96 16.51,60.96 17.78,60.96 19.05,60.96 20.32,60.96 21.59,60.96 27.94,60.96 29.21,60.96 30.48,60.96 31.75,60.96 33.02,60.96 34.29,60.96 35.56,60.96 36.83,60.96 38.1,60.96 39.37,60.96 45.09,60.96 46.35,60.96 47.62,60.96 48.9,60.96 50.16,60.96 51.44,60.96 52.7,60.96 53.98,60.96 55.24,60.96 56.52,60.96 62.23,60.96 63.5,60.96 64.77,60.96 66.04,60.96 67.31,60.96 68.58,60.96 69.85,60.96 71.12,60.96 72.39,60.96 73.66,60.96 80.01,60.96 81.28,60.96 82.55,60.96 83.82,60.96 85.09,60.96 86.36,60.96 87.63,60.96 10.16,35.56 11.43,35.56 12.7,35.56 13.97,35.56 15.24,35.56 16.51,35.56 17.78,35.56 19.05,35.56 20.32,35.56 21.59,35.56 27.94,35.56 29.21,35.56 30.48,35.56 31.75,35.56 33.02,35.56 34.29,35.56 35.56,35.56 36.83,35.56 38.1,35.56 39.37,35.56 3.81,33.02 3.81,34.29 3.81,35.56 3.81,36.83 3.81,38.1 3.81,39.37 3.81,40.64 3.81,41.91 3.81,43.18 3.81,44.45 3.81,20.32 3.81,21.59 3.81,22.86 3.81,24.13 3.81,25.4 3.81,26.67 3.81,27.94 3.81,29.21 3.81,30.48 3.81,31.75 10.16,46.99 11.43,46.99 12.7,46.99 13.97,46.99 15.24,46.99 16.51,46.99 17.78,46.99 19.05,46.99 20.32,46.99 21.59,46.99 27.94,46.99 29.21,46.99 30.48,46.99 31.75,46.99 33.02,46.99 34.29,46.99 35.56,46.99 36.83,46.99 38.1,46.99 39.37,46.99 45.09,46.99 46.35,46.99 47.62,46.99 48.9,46.99 50.16,46.99 51.44,46.99 52.7,46.99 53.98,46.99 55.24,46.99 56.52,46.99 45.72,35.56 46.99,35.56 48.26,35.56 49.53,35.56 50.8,35.56 52.07,35.56 53.34,35.56 62.23,46.99 63.5,46.99 64.77,46.99 66.04,46.99 67.31,46.99 68.58,46.99 69.85,46.99 71.12,46.99 72.39,46.99 73.66,46.99 63.5,35.56 64.77,35.56 66.04,35.56 67.31,35.56 68.58,35.56 69.85,35.56 71.12,35.56 80.01,35.56 81.28,35.56 82.55,35.56 83.82,35.56 85.09,35.56 86.36,35.56 87.63,35.56 80.01,46.99 81.28,46.99 82.55,46.99 83.82,46.99 85.09,46.99 86.36,46.99 87.63,46.99 95.25,20.32 95.25,21.59 3.81,19.05 5.08,19.05 6.35,19.05 7.62,19.05 8.89,19.05 10.16,19.05 11.43,19.05 12.7,19.05 13.97,19.05 15.24,19.05 16.51,19.05 17.78,19.05 19.05,19.05 20.32,19.05 21.59,19.05 22.86,19.05 24.13,19.05 25.4,19.05 26.67,19.05 27.94,19.05 29.21,19.05 30.48,19.05 31.75,19.05 33.02,19.05 34.29,19.05 35.56,19.05 36.83,19.05 38.1,19.05 39.37,19.05 40.64,19.05 41.91,19.05 43.18,19.05 44.45,19.05 45.72,19.05 46.99,19.05 48.26,19.05 49.53,19.05 50.8,19.05 52.07,19.05 53.34,19.05 54.61,19.05 55.88,19.05 57.15,19.05 58.42,19.05 59.69,19.05 60.96,19.05 62.23,19.05 63.5,19.05 64.77,19.05 66.04,19.05 67.31,19.05 68.58,19.05 69.85,19.05 71.12,19.05 72.39,19.05 73.66,19.05 74.93,19.05 76.2,19.05 77.47,19.05 78.74,19.05 80.01,19.05 81.28,19.05 82.55,19.05 83.82,19.05 85.09,19.05 86.36,19.05 87.63,19.05 88.9,19.05 90.17,19.05 91.44,19.05 92.71,19.05 93.98,19.05 95.25,19.05 95.25,22.86 95.25,24.13 95.25,25.4 95.25,26.67 95.25,27.94 95.25,29.21 95.25,30.48 95.25,31.75 95.25,33.02 95.25,34.29 95.25,35.56 95.25,36.83 95.25,38.1 95.25,39.37 95.25,40.64 95.25,41.91 95.25,43.18 95.25,44.45 95.25,45.72 95.25,46.99 95.25,48.26 95.25,49.53 95.25,50.8 95.25,52.07 95.25,53.34 95.25,54.61 95.25,55.88 95.25,57.15 95.25,58.42 95.25,59.69 3.81,58.42 3.81,59.69 3.81,60.96 3.81,45.72 3.81,46.99 3.81,48.26 3.81,49.53 3.81,50.8 3.81,52.07 3.81,53.34 3.81,54.61 3.81,55.88 3.81,57.15
  pour Route15: 3.81,19.05 3.81,60.96 95.25,60.96 95.25,19.05
  pour Route2: 3.81,19.05 3.81,60.96 95.25,60.96 95.25,19.05
  pour Route2: 5.08,68.83 93.98,68.83 93.98,64.14 5.08,64.14
  pour Top: 3.81,19.05 3.81,60.96 95.25,60.96 95.25,19.05
  pour Bottom: 3.81,19.05 3.81,60.96 95.25,60.96 95.25,25.4 88.9,19.05
SIGNAL_GND3
  pour Route15: 5.08,68.83 93.98,68.83 93.98,64.14 5.08,64.14
SIGNAL_GND4
  pour Bottom: 5.08,68.83 93.98,68.83 93.98,64.14 5.08,64.14